# Altium PCB Breakout_24pin.PcbDoc
Units mm, origin at the board's own origin, x right, y up, seen from the top; angles counter-clockwise.
Board outline 55 x 25 mm, 2 copper layers (Top Layer, Bottom Layer), stack 1.571 mm thick; 6 components, 24 nets, 54 pads, 0 vias.
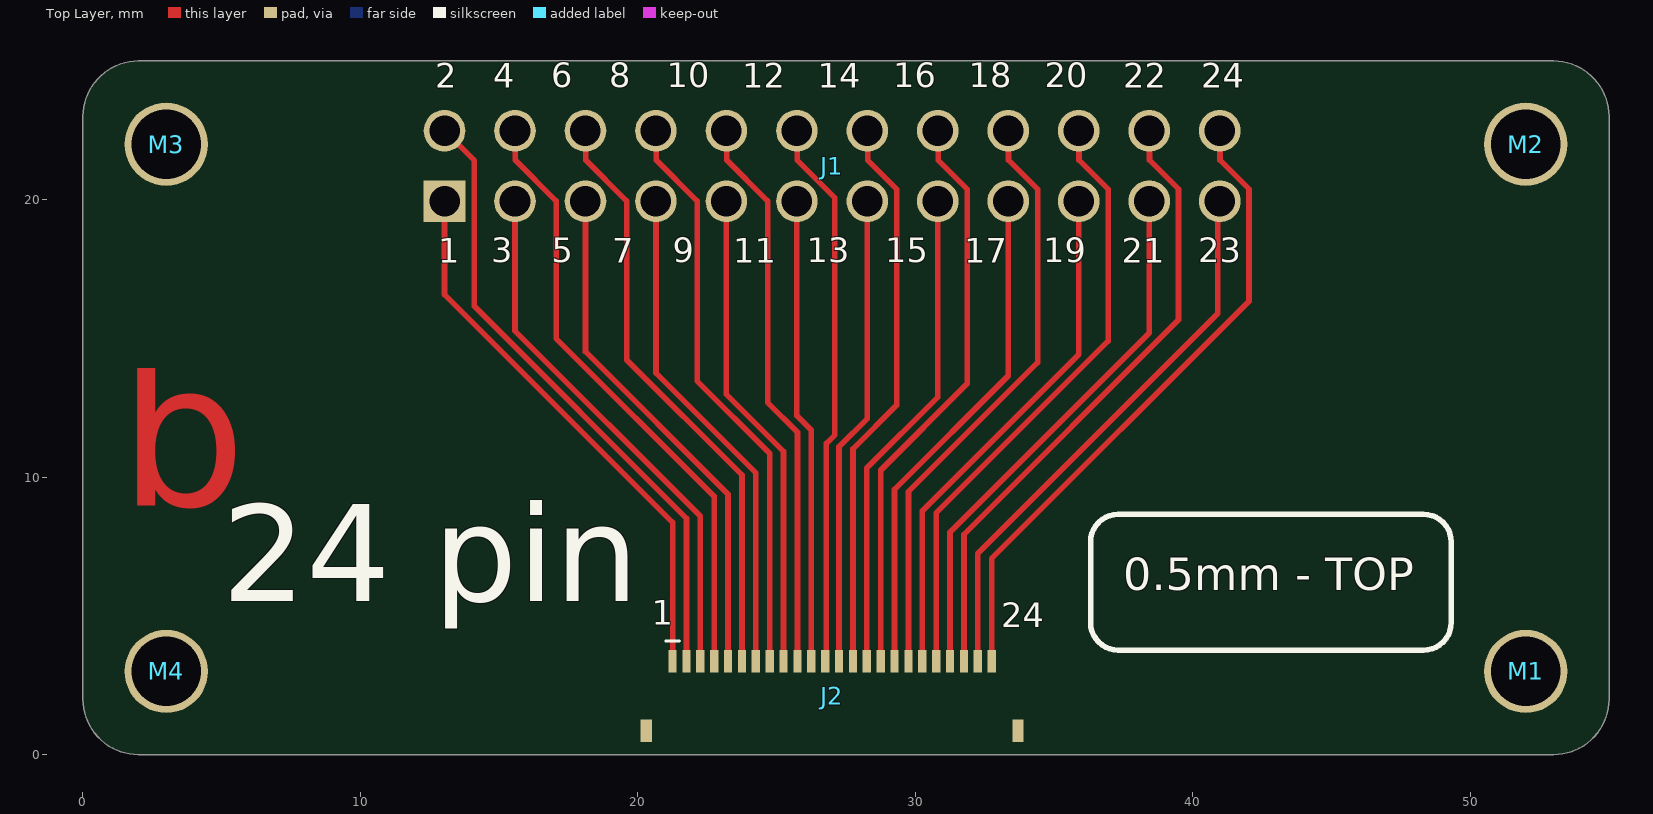
[diagram p0: Top Layer view]
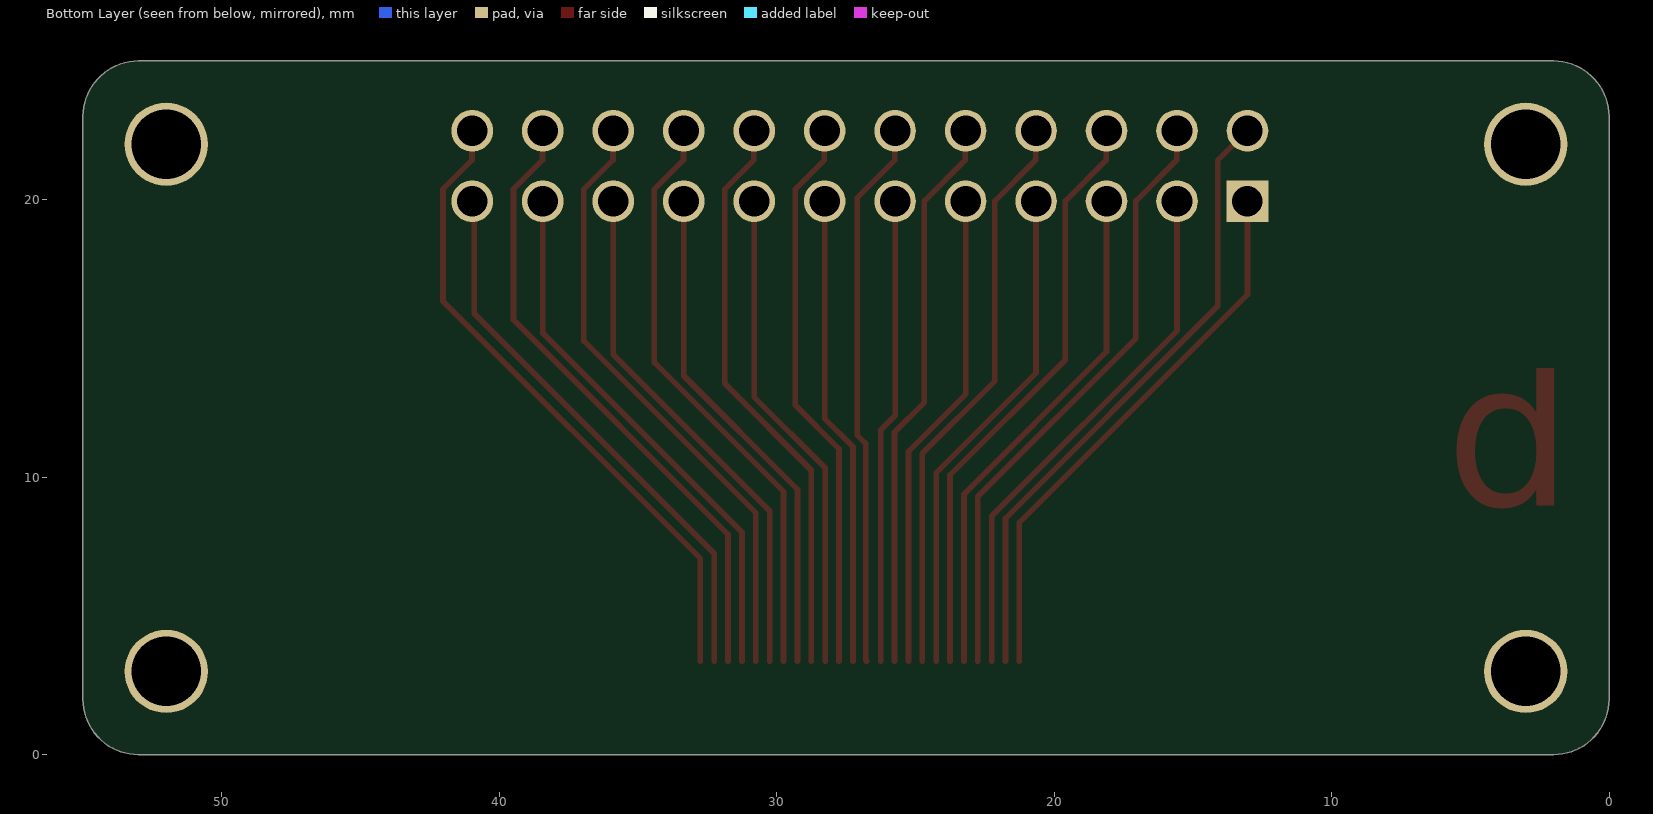
[diagram p1: Bottom Layer view, seen from below]

## Layer stack, top to bottom
Top Solder: solder mask 0.0102, Solder Resist, Dk 3.5
Top Layer: signal copper 0.0356
Dielectric 1: dielectric 1.5, FR-4, Dk 4.8
Bottom Layer: signal copper 0.0356
Bottom Solder: solder mask 0.0102, Solder Resist, Dk 3.5

## Board outline
2,0 cw(c2,2) 0,2 0,23 cw(c2,23) 2,25 53,25 cw(c53,23) 55,23 55,2 cw(c53,2) 53,0

## Design rules (kind name [scope] priority, off if disabled: settings)
Clearance [All] p1: gap=0.204 ignorepadtopadclearanceinfootprint=TRUE
DiffPairsRouting [All] p1: maxlimit=0.254 minlimit=0.064 mostfreqgap=0.127 toplayer_minwidth=0.178 toplayer_maxwidth=0.457 toplayer_prefwidth=0.457 bottomlayer_minwidth=0.178 bottomlayer_maxwidth=0.457 bottomlayer_prefwidth=0.457 impedanceprofiledriven=TRUE maxuncoupledlength=12.7
HoleSize [All] p1: absolutevalues=TRUE maxlimit=5 minlimit=0.153 maxpercent=80.000 minpercent=20.000
PolygonConnect [All] p1: connectstyle=Relief reliefconductorwidth=0.254 reliefentries=4 polygonreliefangle="90 Angle" airgapwidth=0.254
RoutingVias [All] p1: holewidth=0.305 width=0.61 viastyle="Through Hole" minholewidth=0.254 minwidth=0.508 maxholewidth=0.5 maxwidth=1.27
SolderMaskExpansion [All] p1: expansion=0.102 istentingtop=FALSE
Width [All] p1: maxlimit=25.4 minlimit=0.204 preferedwidth=0.254 minimp=50.000000 maximp=50.000000 favimp=50.000000
28 further rules are at their usual default settings.

## Components (designator, comment, footprint, x,y, rotation, side; value= is the part's Value field where it differs from the comment)
J1 "61302421121" HDR-V-2X12-M-TH 27,21.214 r90 top
J2 "FFC2B28-24-G" CONN-FFC-H-24P-0.5MM 27,2.114 r0 top
M1 "MTG_HOLE" MH_P_2.5MM 52,3 r90 top
M2 "MTG_HOLE" MH_P_2.5MM 52,22 r90 top
M3 "MTG_HOLE" MH_P_2.5MM 3,22 r90 top
M4 "MTG_HOLE" MH_P_2.5MM 3,3 r90 top

## Footprints (in the part's own frame and the unit in brackets; to place one, negate y for a bottom-side part, rotate by r counter-clockwise, add the part's x,y. Pads: shape width x height; smd on the part's side, far side on the other; paste and mask are expansions set on the pad)
CONN-FFC-H-24P-0.5MM [mm]
  rect 0.3x0.8 smd: 1(-5.75,1.25) 2(-5.25,1.25) 3(-4.75,1.25) 4(-4.25,1.25) 5(-3.75,1.25) 6(-3.25,1.25) 7(-2.75,1.25) 8(-2.25,1.25) 9(-1.75,1.25) 10(-1.25,1.25) 11(-0.75,1.25) 12(-0.25,1.25) 13(0.25,1.25) 14(0.75,1.25) 15(1.25,1.25) 16(1.75,1.25) 17(2.25,1.25) 18(2.75,1.25) 19(3.25,1.25) 20(3.75,1.25) 21(4.25,1.25) 22(4.75,1.25) 23(5.25,1.25) 24(5.75,1.25)
  rect 0.4x0.8 smd: ME1(-6.7,-1.25) ME2(6.7,-1.25)
  silkscreen extent -6,1.99 -5.5,1.99, body extent -7,-1.8 7,1.45, height 1.76
HDR-V-2X12-M-TH [mm]
  rect 1.5x1.5 hole 1.1: 1(-1.27,13.97)
  round 1.5 hole 1.1: 2(1.27,13.97) 3(-1.27,11.43) 4(1.27,11.43) 5(-1.27,8.89) 6(1.27,8.89) 7(-1.27,6.35) 8(1.27,6.35) 9(-1.27,3.81) 10(1.27,3.81) 11(-1.27,1.27) 12(1.27,1.27) 13(-1.27,-1.27) 14(1.27,-1.27) 15(-1.27,-3.81) 16(1.27,-3.81) 17(-1.27,-6.35) 18(1.27,-6.35) 19(-1.27,-8.89) 20(1.27,-8.89) 21(-1.27,-11.43) 22(1.27,-11.43) 23(-1.27,-13.97) 24(1.27,-13.97)
  body extent -2.54,-15.24 2.54,15.24, height 7.27
MH_P_2.5MM [mm]
  round 3 hole 2.5: 1(0,0)

## Part data
J1: library part HDR-V-2X12-M, "THT Vertical Pin Header WR-PHD, Pitch 2.54 mm, Dual Row, 24 pins", Color=Black, Manufacturer 1="Wurth Electronics", Supplier Part Number 1=732-5303-ND, Category=Connectors, ComponentLink1Description=https://datasheet.ciiva.com/28505/1442180-28505694.pdf?src-supplier=Element14, ComponentLink1URL=https://datasheet.ciiva.com/28505/1442180-28505694.pdf?src-supplier=Element14, Connector Type="Male Pin", Contact Material=Copper, Contact Mating Length=0.236inch, Contact Plating=Gold, Gender=Male, Manufacturer Part Number 1=61302421121, Mount="Through Hole", Number of Contacts=24, Number of Positions=24, Number of Rows=2, Packaging=Bulk, Pitch=0.1inch, Pricing 1="1=1.53000, 10=1.29800, 25=1.08200, 50=0.90100, 100=0.82000, 500=0.74500 (USD)", REACH SVHC=Unknown, RoHS=Yes, RoHS Compliant=Yes, Row Spacing=0.1inch, Stock 1=2450, Supplier 1=Digi-Key, Termination=Solder
J2: library part CONN-FFC-H-24P-0.5MM, "24W, 0.5MM Ffc Con, R/a, Dual Cont,", Manufacturer 1="Global Connector Technology", Supplier Part Number 1=90AJ6017, Category=Connectors, Manufacturer Part Number 1=FFC2B28-24-G, Pricing 1="1=0.848, 250=0.652, 500=0.587, 1000=0.534, 4000=0.534, 5000=0.489 (USD)", RoHS=No, Stock 1=4000, Supplier 1=Newark
M1 M2 M3 M4: "MTG HOLE PLATED VARIOUS SIZES"

## Nets (pads, with @x,y where several pads share a name; then routed paths per layer and width w, separated by ;. In a path a pad name is that pad's centre, name@x,y a point inside that pad or via, vN(x,y) a via of type N, cw(c..) or ccw(c..) an arc to the next point about the centre after c; other vN are vias at no path point)
1: J1.1 J2.1 | length 20
  Top Layer w0.204: J1.1 13.03,16.584 21.25,8.364 J2.1
2: J1.2 J2.2 | length 22.7
  Top Layer w0.204: J1.2 14.106,21.408 14.106,16.16 21.75,8.516 J2.2
3: J1.3 J2.3 | length 19.3
  Top Layer w0.204: J1.3 15.57,15.273 22.25,8.593 J2.3
4: J1.4 J2.4 | length 22.1
  Top Layer w0.204: J1.4 15.579,22.475 15.579,21.428 17.054,19.953 17.054,15.004 22.75,9.308 J2.4
5: J1.5 J2.5 | length 18.7
  Top Layer w0.204: J1.5 18.11,14.525 23.25,9.385 J2.5
6: J1.6 J2.6 | length 21.5
  Top Layer w0.204: J1.6 18.119,22.475 18.119,21.428 19.594,19.953 19.594,14.234 23.75,10.078 J2.6
7: J1.7 J2.7 | length 18.1
  Top Layer w0.204: J1.7 20.65,13.755 24.25,10.155 J2.7
8: J1.8 J2.8 | length 20.8
  Top Layer w0.204: J1.8 20.659,22.475 20.659,21.428 22.134,19.953 22.134,13.464 24.75,10.848 J2.8
9: J1.9 J2.9 | length 17.4
  Top Layer w0.204: J1.9 23.19,12.985 25.25,10.925 J2.9
10: J1.10 J2.10 | length 20.2
  Top Layer w0.204: J1.10 23.199,22.475 23.199,21.428 24.674,19.953 24.674,12.694 25.75,11.618 J2.10
11: J1.11 J2.11 | length 16.8
  Top Layer w0.204: J1.11 25.73,12.215 26.25,11.695 J2.11
12: J1.12 J2.12 | length 19.8
  Top Layer w0.204: J1.12 25.739,22.475 25.739,21.428 27.1,20.067 27.1,11.523 26.794,11.217 26.794,3.408 J2.12
13: J1.13 J2.13 | length 17
  Top Layer w0.204: J2.13 27.25,11.096 28.27,12.116 J1.13
14: J1.14 J2.14 | length 20.2
  Top Layer w0.204: J2.14 27.75,11.019 29.326,12.595 29.326,20.381 28.279,21.428 28.279,22.475 J1.14
15: J1.15 J2.15 | length 17.6
  Top Layer w0.204: J2.15 28.25,10.326 30.81,12.886 J1.15
16: J1.16 J2.16 | length 20.8
  Top Layer w0.204: J2.16 28.75,10.249 31.866,13.365 31.866,20.381 30.819,21.428 30.819,22.475 J1.16
17: J1.17 J2.17 | length 18.3
  Top Layer w0.204: J2.17 29.25,9.556 33.35,13.656 J1.17
18: J1.18 J2.18 | length 21.5
  Top Layer w0.204: J2.18 29.75,9.479 34.406,14.135 34.406,20.381 33.359,21.428 33.359,22.475 J1.18
19: J1.19 J2.19 | length 18.9
  Top Layer w0.204: J2.19 30.25,8.786 35.89,14.426 J1.19
20: J1.20 J2.20 | length 22.1
  Top Layer w0.204: J2.20 30.75,8.709 36.946,14.905 36.946,20.381 35.899,21.428 35.899,22.475 J1.20
21: J1.21 J2.21 | length 19.6
  Top Layer w0.204: J2.21 31.25,8.016 38.43,15.196 J1.21
22: J1.22 J2.22 | length 22.8
  Top Layer w0.204: J2.22 31.75,7.939 39.486,15.675 39.486,20.381 38.439,21.428 38.439,22.475 J1.22
23: J1.23 J2.23 | length 20.2
  Top Layer w0.204: J2.23 32.25,7.246 40.901,15.896 40.901,19.875 J1.23
24: J1.24 J2.24 | length 23.4
  Top Layer w0.204: J2.24 32.75,7.064 42.026,16.34 42.026,20.381 40.979,21.428 40.979,22.475 J1.24
pads on no net: J2.ME1 J2.ME2 M1.1 M2.1 M3.1 M4.1

## Other copper
Top Layer:
  text "b" at 1.3,6.7 h12

## Silkscreen, mask and mechanical layers (free items; w line width, h text height)
Top Overlay:
  lines w0.2: 36.314,4.947 36.314,4.764 ccw(c37.314,4.764) 37.314,3.764 48.314,3.764 ccw(c48.314,4.764) 49.314,4.764 49.314,7.664 ccw(c48.314,7.664) 48.314,8.664 37.314,8.664 ccw(c37.314,7.664) 36.314,7.664 36.314,4.947 ; 36.314,4.947 36.314,4.947
  text "6" at 16.885,23.77 h1.5
  text "8" at 18.961,23.77 h1.5
  text "10" at 21.036,23.77 h1.5
  text "16" at 29.2,23.77 h1.5
  text "18" at 31.927,23.77 h1.5
  text "20" at 34.657,23.77 h1.5
  text "2" at 12.703,23.754 h1.5
  text "4" at 14.779,23.754 h1.5
  text "12" at 23.76,23.754 h1.5
  text "14" at 26.477,23.754 h1.5
  text "22" at 37.485,23.754 h1.5
  text "24" at 40.307,23.754 h1.5
  text "1" at 12.8,17.443 h1.5
  text "3" at 14.706,17.459 h1.5
  text "5" at 16.887,17.459 h1.5
  text "7" at 19.076,17.443 h1.5
  text "9" at 21.25,17.459 h1.5
  text "11" at 23.434,17.443 h1.5
  text "13" at 26.085,17.459 h1.5
  text "15" at 28.922,17.459 h1.5
  text "17" at 31.767,17.443 h1.5
  text "19" at 34.603,17.459 h1.5
  text "21" at 37.443,17.443 h1.5
  text "23" at 40.199,17.459 h1.5
  text "0.5mm - TOP" at 37.5,5.521 h2
  text "1" at 20.5,4.4 h1.5
  text "24 pin" at 4.996,4.368 h6
  text "24" at 33.099,4.3 h1.5
  text "c" at 3.169,-12.043 h50
Board Outline:
  lines w0.1: 27,25 27.5,25 ; 0,2 ccw(c2,2) 2,0 53,0 ccw(c53,2) 55,2 55,23 ccw(c53,23) 53,25 2,25 ccw(c2,23) 0,23 0,2